# Altium PCB HVGA.PcbDoc
Units mil, origin at the board's own origin, x right, y up, seen from the top; angles counter-clockwise.
Board outline 6000 x 4000 mil, 2 copper layers (Top Layer, Bottom Layer); 9 components, 42 nets, 137 pads, 36 vias.
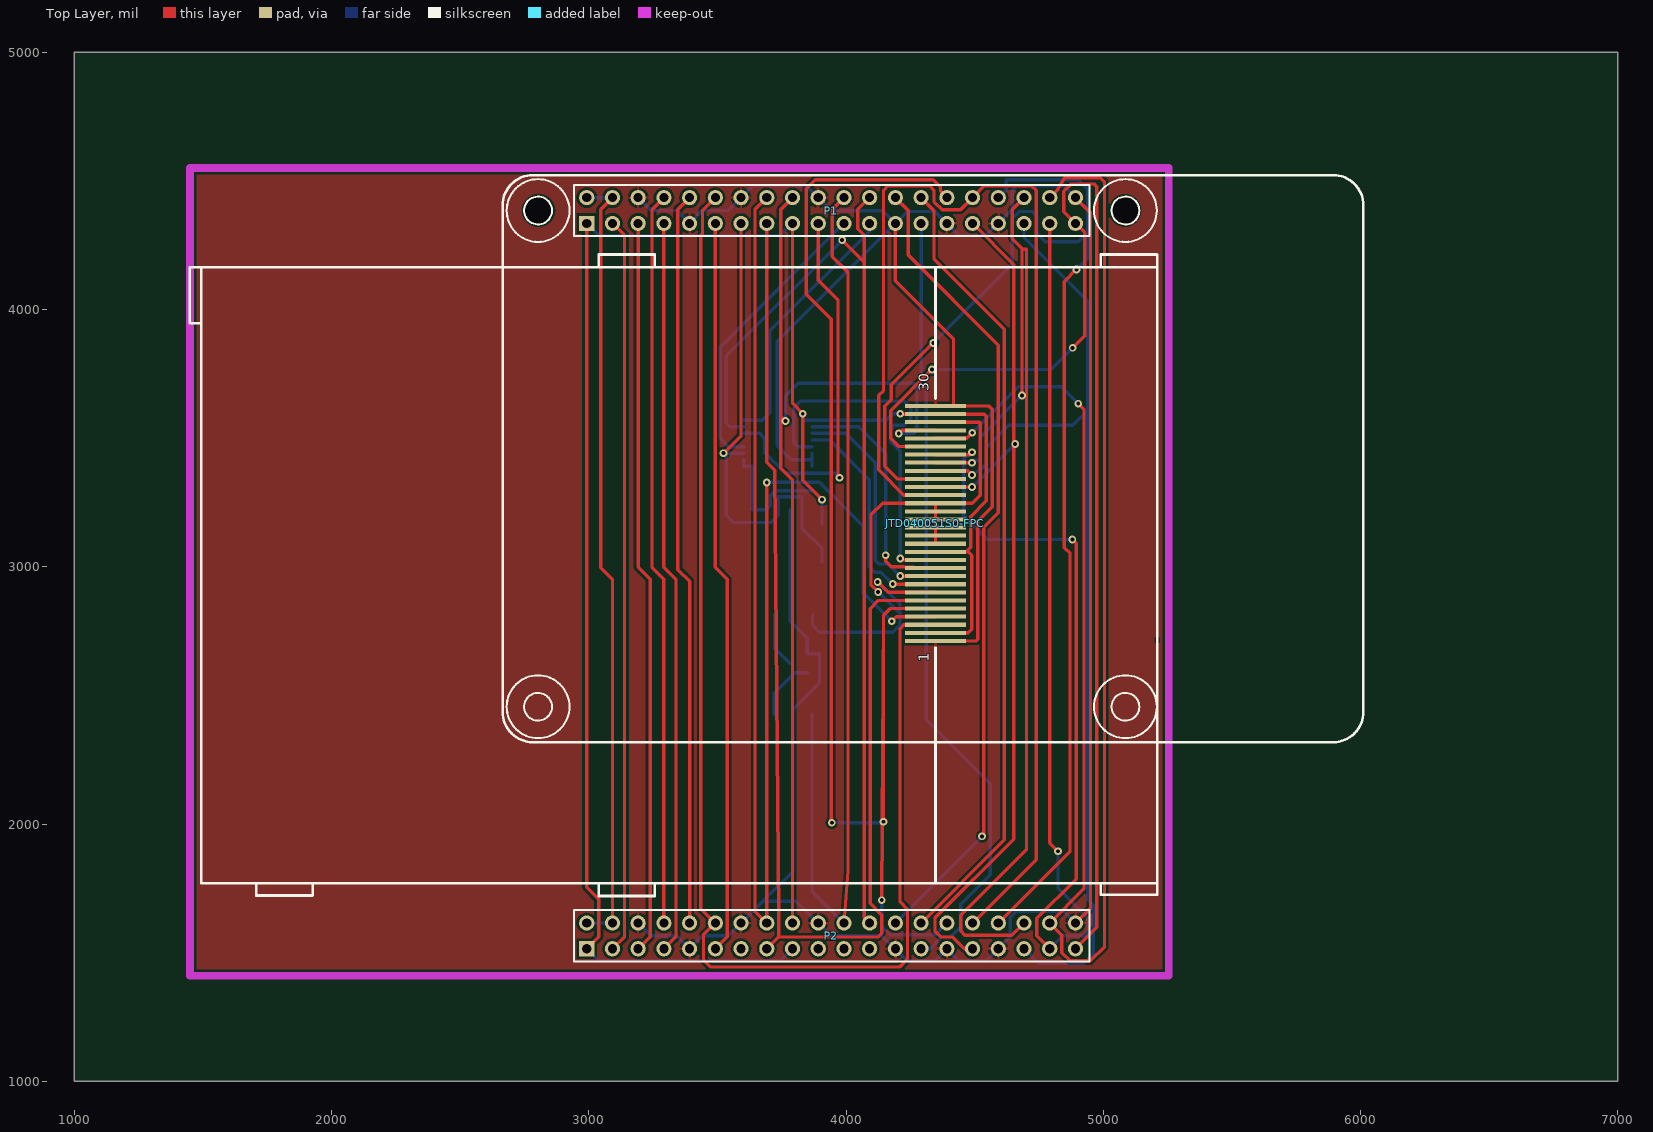
[diagram p0: Top Layer view]
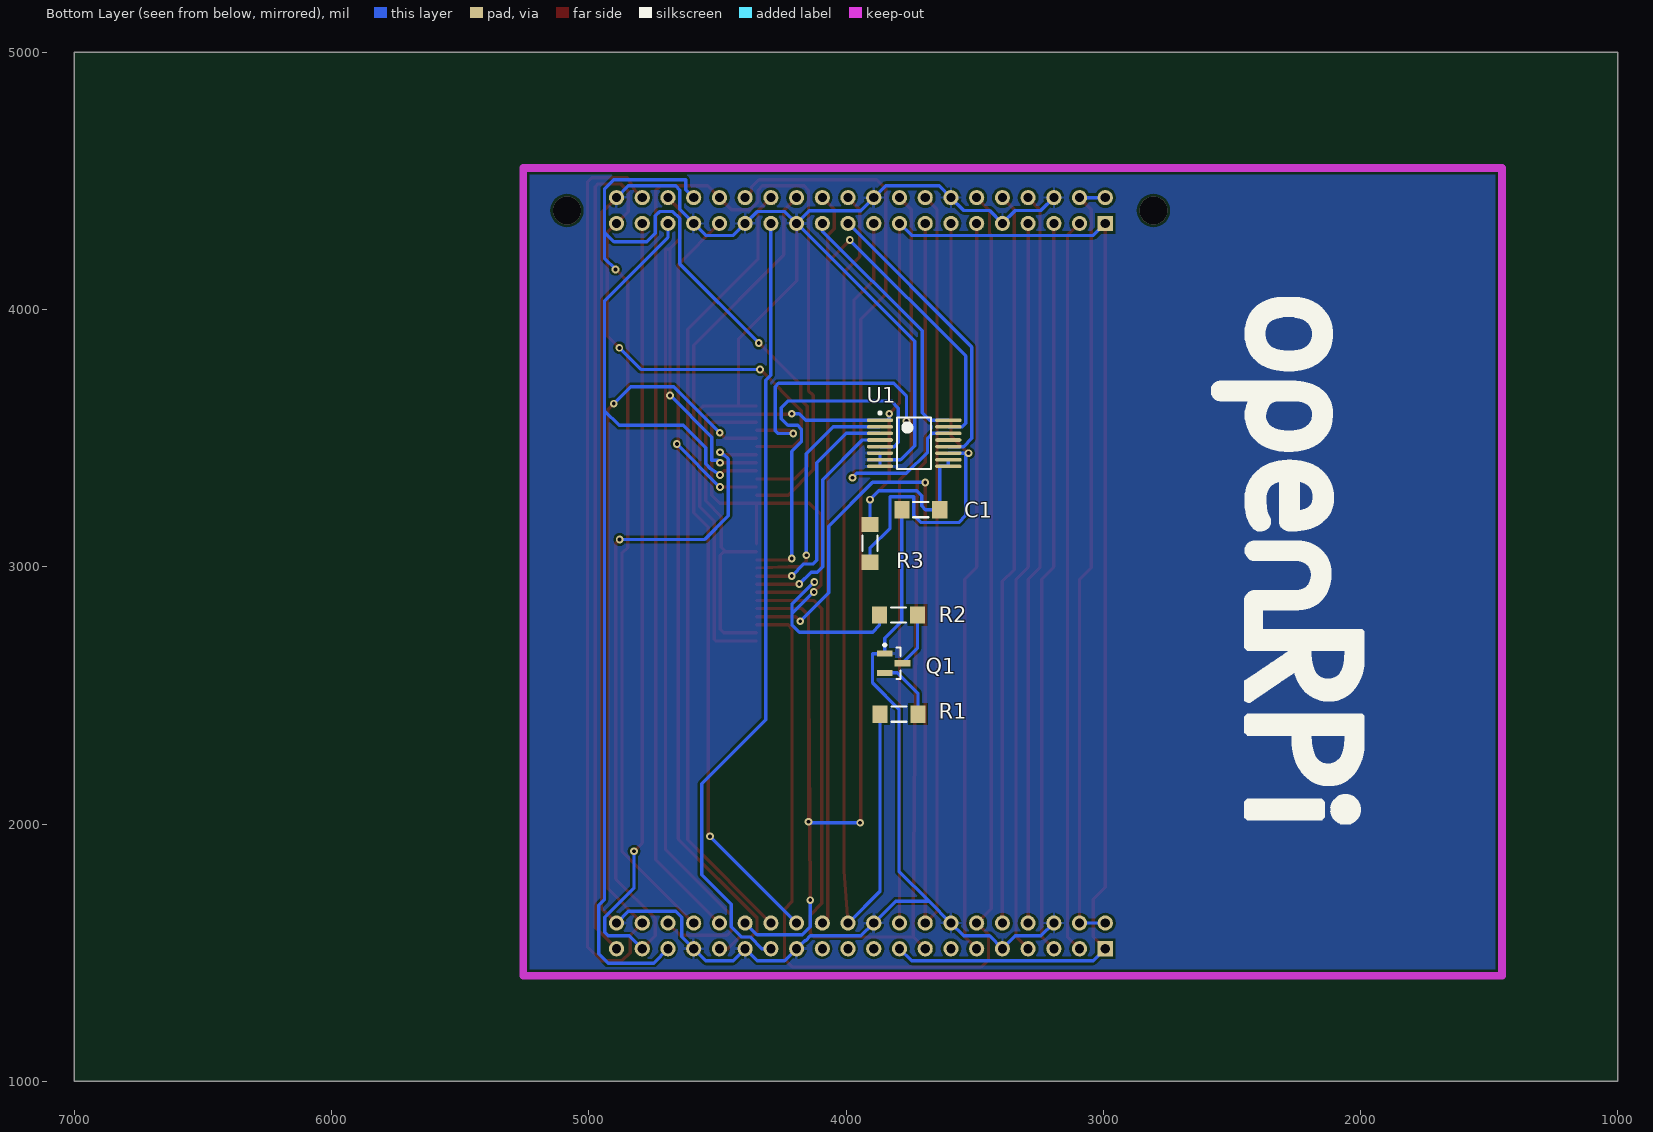
[diagram p1: Bottom Layer view, seen from below]

## Layer stack, top to bottom
Top Layer: signal copper 1.4
Dielectric: dielectric 12.6, FR-4, Dk 4.8
Bottom Layer: signal copper 1.4

## Board outline
1000,1000 7000,1000 7000,5000 1000,5000

## Design rules (kind name [scope] priority, off if disabled: settings)
Clearance [All] p1: gap=10
ComponentClearance [All] p1 off: gap=10 collisioncheckmode=3 verticalgap=10 showdistances=FALSE
HoleToHoleClearance [All] p1: gap=5 allowstackedmicrovias=TRUE
MinimumSolderMaskSliver [All] p1: minsoldermaskwidth=5
PolygonConnect [All] p1: connectstyle=Relief reliefconductorwidth=10 reliefentries=4 polygonreliefangle="90 Angle" airgapwidth=10
RoutingVias [All] p1: holewidth=15 width=30 viastyle="Through Hole" minholewidth=15 minwidth=30 maxholewidth=15 maxwidth=30
SMDNeckDown [All] p1: percent=100.000
SilkToSilkClearance [All] p1: silktosilkclearance=5
SilkToSolderMaskClearance [IsPad] p1: minsilkscreentomaskgap=5 clearancetoexposedcopper=TRUE
SolderMaskExpansion [All] p1: expansion=4
Width [All] p1: maxlimit=15 minlimit=13 preferedwidth=13
23 further rules are at their usual default settings.

## Components (designator, comment, footprint, x,y, rotation, side; value= is the part's Value field where it differs from the comment)
C1 "104" 1206 3815,3255 r180 bottom
JTD040051S0-FPC "JTD040051S0-FPC" JTD040051S0-FPC 5210,1770 r90 top
P1 "raspberry_b+" raspberry_b+ 4310,3450 r0 top
P2 "GPIO20x2" GPIO20x2 2995,1515 r0 top
Q1 "S8050" SOT23 3890,2700 r180 bottom
R1 "register" 1206 3900,2460 r180 bottom
R2 "register" 1206 3690,2780 r0 bottom
R3 "100K" 1206 3940,2985 r90 bottom
U1 "xpt2046" TSSOP16 3735,3480 r180 bottom

## Footprints (in the part's own frame and the unit in brackets; to place one, negate y for a bottom-side part, rotate by r counter-clockwise, add the part's x,y. Pads: shape width x height; smd on the part's side, far side on the other; paste and mask are expansions set on the pad)
1206 [mm]
  rect 1.5x1.7 smd: 1(0.817,-0.838) 2(4.567,-0.838)
  silkscreen extent 1.94,-1.59 3.44,-0.09, body extent 1.09,-1.64 4.29,-0.04, height 1.1
GPIO20x2 [mm]
  rect 1.5x1.5 hole 0.9: 1(-0.075,-0.002)
  round 1.5 hole 0.9: 2(-0.075,2.538) 3(2.465,-0.002) 4(2.465,2.538) 5(5.005,-0.002) 6(5.005,2.538) 7(7.545,-0.002) 8(7.545,2.538) 9(10.085,-0.002) 10(10.085,2.538) 11(12.625,-0.002) 12(12.625,2.538) 13(15.165,-0.002) 14(15.165,2.538) 15(17.705,-0.002) 16(17.705,2.538) 17(20.245,-0.002) 18(20.245,2.538) 19(22.785,-0.002) 20(22.785,2.538) 21(25.325,-0.002) 22(25.325,2.538) 23(27.865,-0.002) 24(27.865,2.538) 25(30.405,-0.002) 26(30.405,2.538) 27(32.945,-0.002) 28(32.945,2.538) 29(35.485,-0.002) 30(35.485,2.538) 31(38.025,-0.002) 32(38.025,2.538) 33(40.565,-0.002) 34(40.565,2.538) 35(43.105,-0.002) 36(43.105,2.538) 37(45.645,-0.002) 38(45.645,2.538) 39(48.185,-0.002) 40(48.185,2.538)
  silkscreen extent -1.34,-1.27 49.58,3.81
JTD040051S0-FPC [mm]
  rect 0.4x6 smd: 1(23.916,21.902) 2(24.716,21.902) 3(25.516,21.902) 4(26.316,21.902) 5(27.116,21.902) 6(27.916,21.902) 7(28.716,21.902) 8(29.516,21.902) 9(30.316,21.902) 10(31.116,21.902) 11(31.916,21.902) 12(32.716,21.902) 13(33.516,21.902) 14(34.316,21.902) 15(35.116,21.902) 16(35.916,21.902) 17(36.716,21.902) 18(37.516,21.902) 19(38.316,21.902) 20(39.116,21.902) 21(39.916,21.902) 22(40.716,21.902) 23(41.516,21.902) 24(42.316,21.902) 25(43.116,21.902) 26(43.916,21.902) 27(44.716,21.902) 28(45.516,21.902) 29(46.316,21.902) 30(47.116,21.902)
  silkscreen extent -1.27,0 62.08,95.55
raspberry_b+ [mm]
  rect 1.5x1.5 hole 0.9: 1(-33.476,22.477)
  round 1.5 hole 0.9: 2(-33.476,25.017) 3(-30.936,22.477) 4(-30.936,25.017) 5(-28.396,22.477) 6(-28.396,25.017) 7(-25.856,22.477) 8(-25.856,25.017) 9(-23.316,22.477) 10(-23.316,25.017) 11(-20.776,22.477) 12(-20.776,25.017) 13(-18.236,22.477) 14(-18.236,25.017) 15(-15.696,22.477) 16(-15.696,25.017) 17(-13.156,22.477) 18(-13.156,25.017) 19(-10.616,22.477) 20(-10.616,25.017) 21(-8.076,22.477) 22(-8.076,25.017) 23(-5.536,22.477) 24(-5.536,25.017) 25(-2.996,22.477) 26(-2.996,25.017) 27(-0.456,22.477) 28(-0.456,25.017) 29(2.084,22.477) 30(2.084,25.017) 31(4.624,22.477) 32(4.624,25.017) 33(7.164,22.477) 34(7.164,25.017) 35(9.704,22.477) 36(9.704,25.017) 37(12.244,22.477) 38(12.244,25.017) 39(14.784,22.477) 40(14.784,25.017)
  silkscreen extent -41.78,-28.75 43.22,27.25
SOT23 [mm]
  rect 1.55x0.6 smd: 1(1.03,-0.955) 2(1.03,-2.855) 3(2.78,-1.905)
  silkscreen extent 0.9,-3.46 2.61,0.02, body extent 1.21,-3.43 2.61,-0.38, height 1.1
TSSOP16 [mm]
  oval 2.6x0.35 smd: 1(-3.375,2.275) 2(-3.375,1.625) 3(-3.375,0.975) 4(-3.375,0.325) 5(-3.375,-0.325) 6(-3.375,-0.975) 7(-3.375,-1.625) 8(-3.375,-2.275) 9(3.375,-2.275) 10(3.375,-1.625) 11(3.375,-0.975) 12(3.375,-0.325) 13(3.375,0.325) 14(3.375,0.975) 15(3.375,1.625) 16(3.375,2.275)
  silkscreen extent -3.5,-2.55 1.67,3.12, body extent -2.25,-2.55 2.25,2.55, height 1.1

## Part data
C1: library part capacitor
P2: library part raspberry_b+
R3: library part register

## Via types
v1: diameter 30, hole 15, Top Layer to Bottom Layer, 34 vias
v2: diameter 108.27, hole 108.27, Top Layer to Bottom Layer, 2 vias

## Nets (pads, with @x,y where several pads share a name; then routed paths per layer and width w, separated by ;. In a path a pad name is that pad's centre, name@x,y a point inside that pad or via, vN(x,y) a via of type N, cw(c..) or ccw(c..) an arc to the next point about the centre after c; other vN are vias at no path point)
3.3V: C1.2 JTD040051S0-FPC.2 JTD040051S0-FPC.12 JTD040051S0-FPC.29 P1.1 P1.17 P2.1 P2.17 R3.2 U1.1 U1.9 U1.10 | length 8214.9
  Top Layer w13: P2.1 3039,1561.88 3039,1707 2992,1754 2992,4281 2992.05,4281.05 P1.1 ; P1.17 3792.05,3634.95 v1(3832,3595) 3832,3336 v1(3907,3261) ; v1(4211,3595) 4212.54,3593.46 JTD040051S0-FPC.29 4537.56,3593.46 4545.5,3585.52 4545.5,3255.68 4485,3195.18 4485,3075 4468.02,3058.02 ; JTD040051S0-FPC.2 4475.56,2743.06 4489,2756.5 4489,3044.02 4475,3058.02 4468.02,3058.02 ; JTD040051S0-FPC.12 4468.02,3058.02
  Bottom Layer w13: P2.1 3038.98,1468 3745.12,1468 P2.17 ; P1.1 3038.98,4288 3745.12,4288 P1.17 ; U1.10 U1.9 3635.18,3390.43 C1.2 3691,3222 3705.5,3236.5 3705.5,3275.47 3725,3294.97 3873.03,3294.97 v1(3907,3261) R3.2 ; v1(3832,3595) 3832,3569.57 U1.1 4157.09,3569.57 4182.52,3595 v1(4211,3595)
5V: P1.2 P1.4 P2.2 P2.4 | length 3058.1
  Top Layer w13: P2.4 3092.05,2951 3046,2997.05 3046,4388.88 P1.4
  Bottom Layer w13: P2.2 P2.4 ; P1.2 P1.4
GND: C1.1 JTD040051S0-FPC.1 JTD040051S0-FPC.30 P1.6 P1.9 P1.14 P1.20 P1.25 P1.29 P1.33 P1.40 P2.6 P2.9 P2.14 P2.20 P2.25 P2.29 P2.33 P2.40 Q1.1 U1.6 U1.7 U1.8 | length 12093.8
  Top Layer w13: P1.25 4192.05,4110.95 4418,3885 JTD040051S0-FPC.30@4418,3624.95 ; JTD040051S0-FPC.1 4506,2711.57 4512,2717.57 4512,3176.18 4568.5,3232.68 4568.5,3612.04 4555.58,3624.95 JTD040051S0-FPC.30@4418,3624.95 ; JTD040051S0-FPC.30 JTD040051S0-FPC.30@4418,3624.95 ; P2.40 4950.5,1673.38 4950.5,4376.48 P1.40
  Bottom Layer w13: P2.6 3241.98,1565 3341.98,1565 P2.9 3442.12,1565 3542.12,1565 P2.14 3677.12,1700 ; P1.6 3241.98,4385 3341.98,4385 P1.9 3442.12,4385 3542.12,4385 P1.14 3638.12,4481 3845.98,4481 P1.20 3942.98,4384 4142.98,4384 P1.25 ; C1.1 3782.82,2788.18 3849.45,2721.55 Q1.1 3897,2662.4 3897,2550 3794,2447 3794,1816.88 3677.12,1700 ; U1.8 U1.7 ; U1.6 U1.7 ; P2.40 4846.02,1660.96 4661.58,1660.96 4638.12,1637.5 4638.12,1561 P2.33 4545.12,1468 4438.98,1468 P2.29 4345.12,1468 4238.98,1468 P2.25 4161.08,1545.9 4157.17,1545.9 4138.08,1565 3941.98,1565 P2.20 3806.98,1700 3677.12,1700 ; P1.40 4846.02,4480.96 4662.5,4480.96 4646.02,4464.48 4646.02,4388.9 P1.33 4545.12,4288 4438.98,4288 P1.29 4345.98,4381 4238.12,4381 P1.25 ; U1.7 3787.98,3416.02 3733.29,3470.71 3733.29,3876.18 P1.25
GPIO_04: P1.7 P2.7 | length 2858.9
  Top Layer w13: P2.7 3339,1561.88 3339,2952 3292.05,2998.95 P1.7
GPIO_17: P1.11 P2.11 | length 2858.9
  Top Layer w13: P2.11 3539,1561.88 3539,2952 3492.05,2998.95 P1.11
GPIO_27: P2.13
I2C0_SCL: P1.5 P2.5 | length 2858.9
  Top Layer w13: P2.5 3239,1561.88 3239,2952 3192.05,2998.95 P1.5
I2C0_SDA: P1.3 P2.3 | length 2858.9
  Top Layer w13: P2.3 3139,1561.88 3139,4287.98 P1.3
ID_SC: P1.27 P2.27 | length 3083.2
  Bottom Layer w13: P2.27 4326.95,1514.93 4373.02,1561 4407,1561 4446,1600 4446,1688 4561,1803 4561,2156 4311.69,2405.31 4311.69,3724.82 4292.05,3744.46 P1.27
ID_SD: P1.28 P2.28 | length 3087.7
  Top Layer w13: P2.28 4615.25,1938.13 4615.25,3923.75 4342,4197 4342,4384.98 P1.28
LCD_DB0: JTD040051S0-FPC.19 P1.32 P2.32 | length 5017.6
  Top Layer w13: JTD040051S0-FPC.19 4225,3278.5 4127.09,3376.41 4127.09,3666.09 4146,3685 4146,4464.5 4162.5,4481 4325,4481 4342,4464 4342,4419.88 4373.88,4388 4445.12,4388 P1.32 4538.08,4480.96 4721.04,4480.96 4739,4463 4739,1861.88 P2.32
LCD_DB1: JTD040051S0-FPC.20 P1.31 P2.31 | length 3505.8
  Top Layer w13: JTD040051S0-FPC.20 v1(4490,3310) ; P2.31 4460,1514.93 4413.93,1561 4368,1561 4346,1583 4346,1635 4652.5,1941.5 v1@4652.5,3482.5 ; P1.31 4652.5,4174.48 v1@4652.5,3482.5 ; v1(4657.5,3477.5) v1@4652.5,3482.5
  Bottom Layer w13: v1(4490,3310) v1(4657.5,3477.5)
LCD_DB2: JTD040051S0-FPC.21 P1.34 P2.34 | length 5223.2
  Top Layer w13: v1(4339,3870) 4175.92,3706.92 4175.92,3649.5 4150.09,3623.67 4150.09,3390.4 4199,3341.49 JTD040051S0-FPC.21 ; P2.34 4871,1893.88 4871,3052 4848.5,3074.5 4848.5,4108.5 v1(4896,4156)
  Bottom Layer w13: v1(4339,3870) 4646.02,4177.02 4646.02,4354 4672.98,4380.96 4725,4380.96 4742,4363.96 4742,4296 4775,4263 4902,4263 4939,4300 ; P1.34 4623.02,4465.9 4623.02,4503.96 4903.04,4503.96 4939,4468 4939,4300 ; v1(4896,4156) 4939,4199 4939,4300
LCD_DB3: JTD040051S0-FPC.22 P1.35 P2.35 | length 3994.1
  Top Layer w13: JTD040051S0-FPC.22 4474.02,3372.98 v1(4490,3357)
  Bottom Layer w13: v1(4490,3357) 4527,3382 4545,3400 4545,3463 4632,3550 4882,3550 4939,3607 ; P2.35 4747.98,1459 4925,1459 4961.08,1495.08 4961.08,1683.96 4939,1706.03 4939,3607 ; P1.35 4692.05,4279.95 4939,4033 4939,3607
LCD_DB4: JTD040051S0-FPC.23 P1.36 P2.36 | length 4347
  Top Layer w13: JTD040051S0-FPC.23 v1(4490,3404.48) ; v1(4684,3666) 4684,4234.5 ; P2.36 4645.12,1568 4462.5,1568 4446.02,1584.48 4446.02,1644.48 4701.5,1899.96 4701.5,4234.5 4684,4234.5 ; P1.36 4646,4388.88 4646,4276 4684,4238 4684,4234.5
  Bottom Layer w13: v1(4490,3404.48) 4499.02,3413.5 4522,3413.5 4522,3504 v1(4684,3666)
LCD_DB5: JTD040051S0-FPC.24 P1.37 P2.37 | length 5540.2
  Top Layer w13: JTD040051S0-FPC.24 4480.98,3435.98 v1(4490,3445) ; P2.37 4742,1564.98 4742,1633 4895,1786 4895,3091 v1(4880,3106) ; P1.37 4792.05,1925.95 v1(4824,1894)
  Bottom Layer w13: v1(4490,3445) 4480.98,3435.98 4475,3435.98 4458,3418.98 4458,3198 4550,3106 v1(4880,3106) ; P2.37 4842.12,1565 4924,1565 4938.08,1579.08 4938.08,1637.92 4824,1752 v1(4824,1894)
LCD_DB6: JTD040051S0-FPC.25 P1.39 P2.39 | length 4906.6
  Top Layer w13: v1(4334,3767) 4173.5,3606.5 4173.5,3500 4206.03,3467.47 JTD040051S0-FPC.25 ; v1(4881,3851) 4927.5,3897.5 4927.5,4299.48 P1.39 4846,4380.98 4846,4459 4875,4488 4965,4488 4975,4478 4975,1597.88 P2.39
  Bottom Layer w13: v1(4334,3767) 4797,3767 v1(4881,3851)
LCD_DB7: JTD040051S0-FPC.26 P1.38 P2.38 | length 6316.8
  Top Layer w13: JTD040051S0-FPC.26 4468.97,3498.97 v1(4491,3521) ; P1.38 4823,4465.88 4850,4512 4988,4512 5005,4495 5005,1523 4950,1468 4871,1468 4839,1500 4839,1567.98 P2.38 4925,1747.88 4925,3612 v1(4903,3634)
  Bottom Layer w13: v1(4491,3521) 4670,3700 4837,3700 v1(4903,3634)
LCD_DC: JTD040051S0-FPC.4 P1.16 P2.16 | length 5609.7
  Top Layer w13: v1(3692.05,3328) P2.16 3646,1660.98 3646,4388.88 P1.16 ; v1(4178,2788) 4196.05,2806.05 JTD040051S0-FPC.4
  Bottom Layer w13: v1(3692.05,3328) 3897,3328 4066.59,3158.41 4066.59,2899.41 v1(4178,2788)
LCD_H_CS: JTD040051S0-FPC.3 P1.12 P2.12 | length 5285.8
  Top Layer w13: P1.12 3442,4384.88 3442,4295 3436,4289 3436,1670.98 P2.12 3446,1568.88 3446,1473 3475,1444 4208,1444 4239,1475 4239,1669 4210,1698 4210,2759.56 4225,2774.56 JTD040051S0-FPC.3
LCD_LED: P1.22 P2.22 R1.1 | length 3728.8
  Top Layer w13: P2.22 4007.8,1818.25 4007.8,4144.2 3946,4206 3946,4388.88 P1.22
  Bottom Layer w13: R1.1 3867.82,1739.16 P2.22
LCD_RD: JTD040051S0-FPC.6 P1.15 P2.15 | length 4806.5
  Top Layer w13: P2.15 3738.12,1561 ; P1.15 3692.05,3406.5 3723.55,3375 3738.08,1645.92 3738.12,1561 ; JTD040051S0-FPC.6 4126.05,2869.05 4094,2837 4094,1691 4139,1646 4139,1575 4125,1561 3738.12,1561
LCD_RESET: JTD040051S0-FPC.27 P1.18 P2.18 | length 3911.3
  Top Layer w13: v1(3765,3567) 3746,3586 ; P2.18 3792.05,3337 3746,3383.05 3746,3586 ; P1.18 3746,4388.88 3746,3586 ; v1(4205,3518) 4217.46,3530.46 JTD040051S0-FPC.27
  Bottom Layer w13: v1(3765,3567) 3765,3664 3814,3713 4262.5,3713 4275,3700.5 4275,3529.17 4263.83,3518 v1(4205,3518)
LCD_SCLK: P2.23
LCD_SDI: P2.19
LCD_SDO: P2.21
LCD_WR: JTD040051S0-FPC.5 P1.30 P2.30 | length 5826.7
  Top Layer w13: v1@3943,2005 3943,3962 3846,4059 3846,4470 3880,4504 4338.48,4504 4367.48,4475 4367.48,4459.5 P1.30 ; v1(4139,1704) 4140.93,2009.03 4146,2812.5 ; v1(4146,2009) 4146,2812.5 ; JTD040051S0-FPC.5 4171.05,2837.55 4146,2812.5
  Bottom Layer w13: v1(3945,2005) 4150,2005 v1(4146,2009) ; v1(4139,1704) 4139,1600 4170.1,1568.9 4346.02,1568.9 P2.30
LEDK: JTD040051S0-FPC.7 JTD040051S0-FPC.13 JTD040051S0-FPC.14 JTD040051S0-FPC.15 JTD040051S0-FPC.16 JTD040051S0-FPC.17 JTD040051S0-FPC.18 JTD040051S0-FPC.28 R2.2 | length 2350.1
  Top Layer w13: v1(4123.09,2941) 4163.55,2900.54 JTD040051S0-FPC.7 ; v1(4125,2902) 4097,2930 4097,3202 4142,3247 JTD040051S0-FPC.18 ; JTD040051S0-FPC.13 JTD040051S0-FPC.14 JTD040051S0-FPC.15 JTD040051S0-FPC.16 JTD040051S0-FPC.17 JTD040051S0-FPC.18 ; JTD040051S0-FPC.28 4519.54,3561.96 4522.5,3559 4522.5,3278.68 4490.82,3247 JTD040051S0-FPC.18
  Bottom Layer w13: R2.2 3869.82,2772.18 3896,2746 4181,2746 4210,2775 4210,2817 ; v1(4123.09,2941) 4210,2854.09 4210,2817 ; v1(4125,2902) 4210,2817
NetQ1_2: Q1.2 R1.2 | length 243.1
  Bottom Layer w13: R1.2 3720.18,2507.78 3800,2587.6 Q1.2
NetQ1_3: Q1.3 R2.1 | length 212.2
  Bottom Layer w13: R2.1 3722.18,2683.37 Q1.3
SPI0_CE1: P1.26 P2.26 | length 3151.5
  Top Layer w13: P1.26 4242,4384.98 4242,4212 4592.25,3861.75 4592.25,3210.43 4535,3153.18 4535,1957.88 v1(4529,1951.88)
  Bottom Layer w13: P2.26 v1(4529,1951.88)
TP_CS: P1.24 P2.24 U1.15 | length 3951.9
  Top Layer w13: v1(3985,4270) 4071,4184 ; P2.24 4071,1635.98 4071,4184 ; P1.24 4046.02,4388.9 4046.02,4313.38 4070.5,4288.9 4071,4184
  Bottom Layer w13: U1.15 3548,3543.98 3534.44,3557.53 3534.44,3819.44 v1(3985,4270)
TP_IRQ: P1.13 R3.1 U1.11 | length 1918.4
  Top Layer w13: v1(3524,3441.61) 3592.05,3509.66 P1.13
  Bottom Layer w13: v1(3524,3441.61) v1@3534,3441.61 ; U1.11 v1@3534,3441.61 ; R3.1 3907,3071.85 3828.85,3150 3828.85,3271.97 3736,3271.97 3736,3200 3708,3172 3562,3172 3534,3200 v1@3534,3441.61
TP_SCLK: P1.23 U1.16 | length 1011
  Bottom Layer w13: U1.16 3675,3569.57 3704,3598.57 3704,3917 4092.05,4305.05 P1.23
TP_SI: P1.19 U1.14 | length 1499.8
  Top Layer w13: P1.19 3892.05,4112.95 3969,4036 3969,3352 v1(3975,3346)
  Bottom Layer w13: U1.14 3664.61,3518.39 3683,3500 3683,3445 3765,3363 3958,3363 v1(3975,3346)
TP_SO: P1.21 U1.12 | length 1139
  Bottom Layer w13: U1.12 3543,3467.2 3511.44,3498.76 3511.44,3854.32 P1.21
UART0_RXD: P1.10 P2.10 | length 2858.1
  Top Layer w13: P2.10 3392.05,2942.81 3346,2988.86 3346,4388.88 P1.10
UART0_TXD: P1.8 P2.8 | length 2858.1
  Top Layer w13: P2.8 3292.05,2951 3246,2997.05 3246,4388.88 P1.8
X+: JTD040051S0-FPC.10 U1.2 | length 950.3
  Top Layer w13: v1(4154,3045) 4154,3021.42 4175,3000.42 4223.58,3000.42 JTD040051S0-FPC.10
  Bottom Layer w13: U1.2 4050,3543.98 4154,3439.98 v1(4154,3045)
X-: JTD040051S0-FPC.8 U1.4 | length 910.7
  Top Layer w13: v1(4182,2933) 4182.96,2932.04 JTD040051S0-FPC.8
  Bottom Layer w13: U1.4 3936.52,3492.8 4090.25,3339.07 4090.25,3000 4111.25,2979 4136,2979 v1(4182,2933)
Y+: JTD040051S0-FPC.9 U1.3 | length 932
  Top Layer w13: v1(4211,2964) 4211.46,2963.54 JTD040051S0-FPC.9
  Bottom Layer w13: U1.3 3999.43,3518.39 4113.25,3404.57 4113.25,3025 4127.25,3011 4164,3011 v1(4211,2964)
Y-: JTD040051S0-FPC.11 U1.5 | length 1483.7
  Top Layer w13: v1(4211,3032) 4216.47,3026.53 JTD040051S0-FPC.11
  Bottom Layer w13: U1.5 3812.5,3467.2 3796.5,3483.2 3796.5,3616 3825,3644.5 4225,3644.5 4251.06,3618.44 4251.06,3575 4225.56,3549.5 4187.5,3549.5 4173.09,3535.09 4173.09,3486.17 4211,3448.26 v1(4211,3032)
pads on no net: U1.13
copper on no net:
  other v2: 2805,4385 5085,4385

## Polygon pours and split planes (outlines as drawn)
GND on Top Layer "Bottom Layer-No Net" (solid, remove dead copper, pour order 4): 1450,4540 5245,4540 5255,4550 5255,1410 1465,1410 1450,1425
GND on Bottom Layer "Bottom Layer-No Net" (solid, remove dead copper, pour order 6): 1450,4540 5255,4540 5255,1410 5240,1425 1450,1425

## Keep-outs
Keep-Out Layer:
  lines w30: 1450,1410 5255,1410 5255,4550 1450,4550 1450,1410

## Silkscreen, mask and mechanical layers (free items; w line width, h text height)
Bottom Overlay:
  drawing of 3929 lines, arcs and shapes, not listed

## Dimensions
1450,4550 to 1450,1410 on Top Overlay
1450,4550 to 5255,4550 on Top Overlay

## Text inside footprints (layer, text, board x,y; h text height)
JTD040051S0-FPC: Top Overlay "30" at 4322,3683 h40 r90; Top Overlay "1" at 4322,2631 h40 r90